# EAGLE board BeerCannon_backup (EAGLE 7.2.0)

Size 90.47 x 67.3 mm. Coordinates in mm from the lower left corner, seen from the top.
Outline: 0,0 90.47,0 90.47,67.3 0,67.3 0,0
Copper layers (1*16): Top 0.035mm / dielectric 1.5mm / Bottom 0.035mm
Design rules "SparkFun *": minimum track width 8mil, minimum drill 20mil, track to track 8mil, track to pad 8mil, pad to pad 8mil, via to via 8mil, smd to smd 8mil, copper to edge 8mil, drill to drill 8mil, minimum pad ring 12mil, minimum via ring 10mil, stop-mask expansion 4mil, vias tented up to drill 20mil, thermal gap 10mil

## Footprints (pad centres in the part's own frame; a part is rotated, then mirrored left to right if it is on the bottom)
BATTCON_9V = drill 1.905: + 0,0; - 0,-12.954
EIA3216 = smd 1.4 x 1.6: A 1.4,0; C -1.4,0
1206 = smd 1.6 x 1.8: 1 -1.4,0; 2 1.4,0
SMA-DIODE = smd 1.27 x 1.47: A -2.15,0; C 2.15,0
1X04 = drill 1.016 pad 1.88 square: 1 0,0 | drill 1.016 pad 1.88: 2 2.54,0; 3 5.08,0; 4 7.62,0
LED-1206 = smd 1.2 x 1.4: A -1.5,0; C 1.5,0
ALPS_POT = drill 1 pad 1.88 square: P$1 7,-2.5; P$2 7,0; P$3 7,2.5 | drill 2 octagon: P$4 0,-4.4; P$5 0,4.4
JOYSTICK = drill 0.9 pad 1.778: B1A -3.175,12.7; B1B 3.175,12.7; B2A -3.175,7.62; B2B 3.175,7.62 | drill 0.889 pad 1.778: H1 -2.54,-10.16; H2 0,-10.16; H3 2.54,-10.16; V1 -10.16,2.54; V2 -10.16,0; V3 -10.16,-2.54 | drill 1.397 pad 2.286: MOUNT1 -7.62,6.668; MOUNT2 -7.62,-6.668; MOUNT3 7.62,-6.668; MOUNT4 7.62,6.668
LCD-16X2_NOSILK = drill 1.016 pad 1.88 square: 1 -32,15.5 | drill 1.016 pad 1.88: 2 -29.46,15.5; 3 -26.92,15.5; 4 -24.38,15.5; 5 -21.84,15.5; 6 -19.3,15.5; 7 -16.76,15.5; 8 -14.22,15.5; 9 -11.68,15.5; 10 -9.14,15.5; 11 -6.6,15.5; 12 -4.06,15.5; 13 -1.52,15.5; 14 1.02,15.5; 15 3.56,15.5; 16 6.1,15.5 | hole 2.8: -37.5,15.5; -37.5,-15.5; 37.5,15.5; 37.5,-15.5
DIL28-3 = drill 0.813 long: 1 -16.51,-3.81; 2 -13.97,-3.81; 3 -11.43,-3.81; 4 -8.89,-3.81; 5 -6.35,-3.81; 6 -3.81,-3.81; 7 -1.27,-3.81; 8 1.27,-3.81; 9 3.81,-3.81; 10 6.35,-3.81; 11 8.89,-3.81; 12 11.43,-3.81; 13 13.97,-3.81; 14 16.51,-3.81; 15 16.51,3.81; 16 13.97,3.81; 17 11.43,3.81; 18 8.89,3.81; 19 6.35,3.81; 20 3.81,3.81; 21 1.27,3.81; 22 -1.27,3.81; 23 -3.81,3.81; 24 -6.35,3.81; 25 -8.89,3.81; 26 -11.43,3.81; 27 -13.97,3.81; 28 -16.51,3.81
SOT23-5 = smd 0.55 x 1.2: 1 -0.95,-1.3; 2 0,-1.3; 3 0.95,-1.3; 4 0.95,1.3; 5 -0.95,1.3
SWITCH-SPST-VERTICAL = drill 1.4 pad 2.286: 1 0,7; 2 0,0
HC49UP = smd 5.334 x 1.93: 1 -4.826,0; 2 4.826,0

## Placement (x,y rotation side)
BAT1  [BATTCON_9V]  22.22,54.61 90 bottom
C1  [EIA3216]  38.73,2.54 0 bottom
C2  [1206]  45.09,62.23 90 bottom
C3  [EIA3216]  22.22,60.96 90 bottom
C6  [1206]  67.94,62.23 270 bottom
D2  [SMA-DIODE]  36.2,48.26 90 bottom
FRAME1  FRAME-LETTER  [CREATIVE_COMMONS]  -78.11,77.47 0 top  (outside the outline)
JP1  [1X04]  40.01,17.78 270 bottom
JP2  [1X04]  42.55,10.16 90 bottom
JP3  [1X04]  70.48,13.97 270 bottom
LED1  [LED-1206]  3.17,59.69 90 top
R1  [1206]  3.17,64.77 180 top
R2  [1206]  4.45,53.34 180 top
R3  [1206]  40.01,26.67 180 bottom
R4  [1206]  83.18,62.23 270 bottom
R5  [1206]  72.39,62.23 270 bottom
RV1  [ALPS_POT]  69.21,21.59 90 bottom
U1  JOYSTICKPTH  [JOYSTICK]  14.61,15.24 0 top
U2  LCD-16X2NOSILK  [LCD-16X2_NOSILK]  48.9,48.26 180 top
U3  ATMEGA328P_PDIP  [DIL28-3]  59.05,48.26 180 bottom
U4  V_REG_LDOSMD  [SOT23-5]  36.2,60.96 90 bottom
U5  V_REG_LDOSMD  [SOT23-5]  33.66,7.62 90 bottom
U$1  SWITCH-SPST-2TV  [SWITCH-SPST-VERTICAL]  83.18,13.97 0 top
U$2  SWITCH-SPST-2TV  [SWITCH-SPST-VERTICAL]  36.2,13.97 0 top
Y1  [HC49UP]  56.52,60.96 180 bottom

## Library data of the parts
BAT1 RV1 U1 U$1 U$2 = SparkFun-Electromechanical
C1-C3 C6 R1-R5 = SparkFun-Passives
D2 = SparkFun-DiscreteSemi
FRAME1 = SparkFun-Aesthetics
JP1-JP3 = SparkFun-Connectors
LED1 = SparkFun-LED
U2 = SparkFun-Displays
U3 = SparkFun-DigitalIC
U4 U5 = SparkFun-PowerIC
Y1 = SparkFun-FreqCtrl

## Nets
A: U2.15
ANALOG1: R3.2 U3.24
ANALOG2: U1.H2 U3.25
ANALOG3: U1.V2 U3.26
CE: JP1.2 U3.15
CSN: JP2.3 U3.16
DIG6: U2.6 U3.12
DIG7: U2.4 U3.13
GND: BAT1.+ C1.A C2.1 C3.A C6.1 JP1.1 JP3.4 R1.2 R5.1 U1.H3 U1.V3 U2.2 U3.8 U3.22 U4.2 U5.2
IRQ: JP2.1
K: U2.16
MISO: JP1.4 U3.18
MOSI: JP2.2 U3.17
N$1: LED1.C R1.1
N$2: D2.A U$2.1
N$3: R3.1 U1.B2A
N$4: R2.1 U3.1
N$5: R4.2 U$1.2
N$7: C2.2 U3.9 Y1.1
N$8: C6.2 U3.10 Y1.2
N$10: D2.C U4.1 U4.3
N$12: RV1.P$2 U2.3
N$13: R4.1 R5.2 U3.14
N$14: RV1.P$1 U2.5
PIN4: U2.14 U3.4
PIN5: U2.13 U3.5
PIN6: U2.12 U3.6
PIN11: U2.11 U3.11
SCK: JP1.3 U3.19
V33: C1.C JP2.4 JP3.3 U5.5
VCC: BAT1.- JP3.1 U5.1 U5.3 U$2.2
VPWR: C3.C JP3.2 LED1.A R2.2 RV1.P$3 U1.B1A U1.H1 U1.V1 U2.1 U3.7 U3.20 U4.5 U$1.1

## Tracks (layer width: path | path; a pad name or v marks a point on that pad's centre or on a via)
ANALOG1  (1 unrouted)
ANALOG2  (1 unrouted)
ANALOG3  (1 unrouted)
CE  (1 unrouted)
CSN  (1 unrouted)
DIG6  (1 unrouted)
DIG7  (1 unrouted)
GND  (15 unrouted)
MISO  (1 unrouted)
MOSI  (1 unrouted)
N$1  (1 unrouted)
N$2  (1 unrouted)
N$3  (1 unrouted)
N$4  (1 unrouted)
N$5  (1 unrouted)
N$7  (2 unrouted)
N$8  (2 unrouted)
N$10  (2 unrouted)
N$12  (1 unrouted)
N$13  (2 unrouted)
N$14  (1 unrouted)
PIN4  (1 unrouted)
PIN5  (1 unrouted)
PIN6  (1 unrouted)
PIN11  (1 unrouted)
SCK  (1 unrouted)
V33  (3 unrouted)
VCC  (4 unrouted)
VPWR  (12 unrouted)

## Text on the board
tPlace: Cannon | Remote | V1.0 | Mavis | Blue | Beacon | Cobalt | Studios | 2014
bPlace: GND | V33 | VCC | VPWR | V33 | GND